# Altium PCB PCB_wordclocksmall_2023-02-03.pcbdoc (part 1 of 4)
Units mm, origin at the board's own origin, x right, y up, seen from the top; angles counter-clockwise.
Board outline 275.21 x 268.14 mm, 2 copper layers (Top Layer, Bottom Layer); 355 components, 229 nets, 1166 pads, 399 vias.
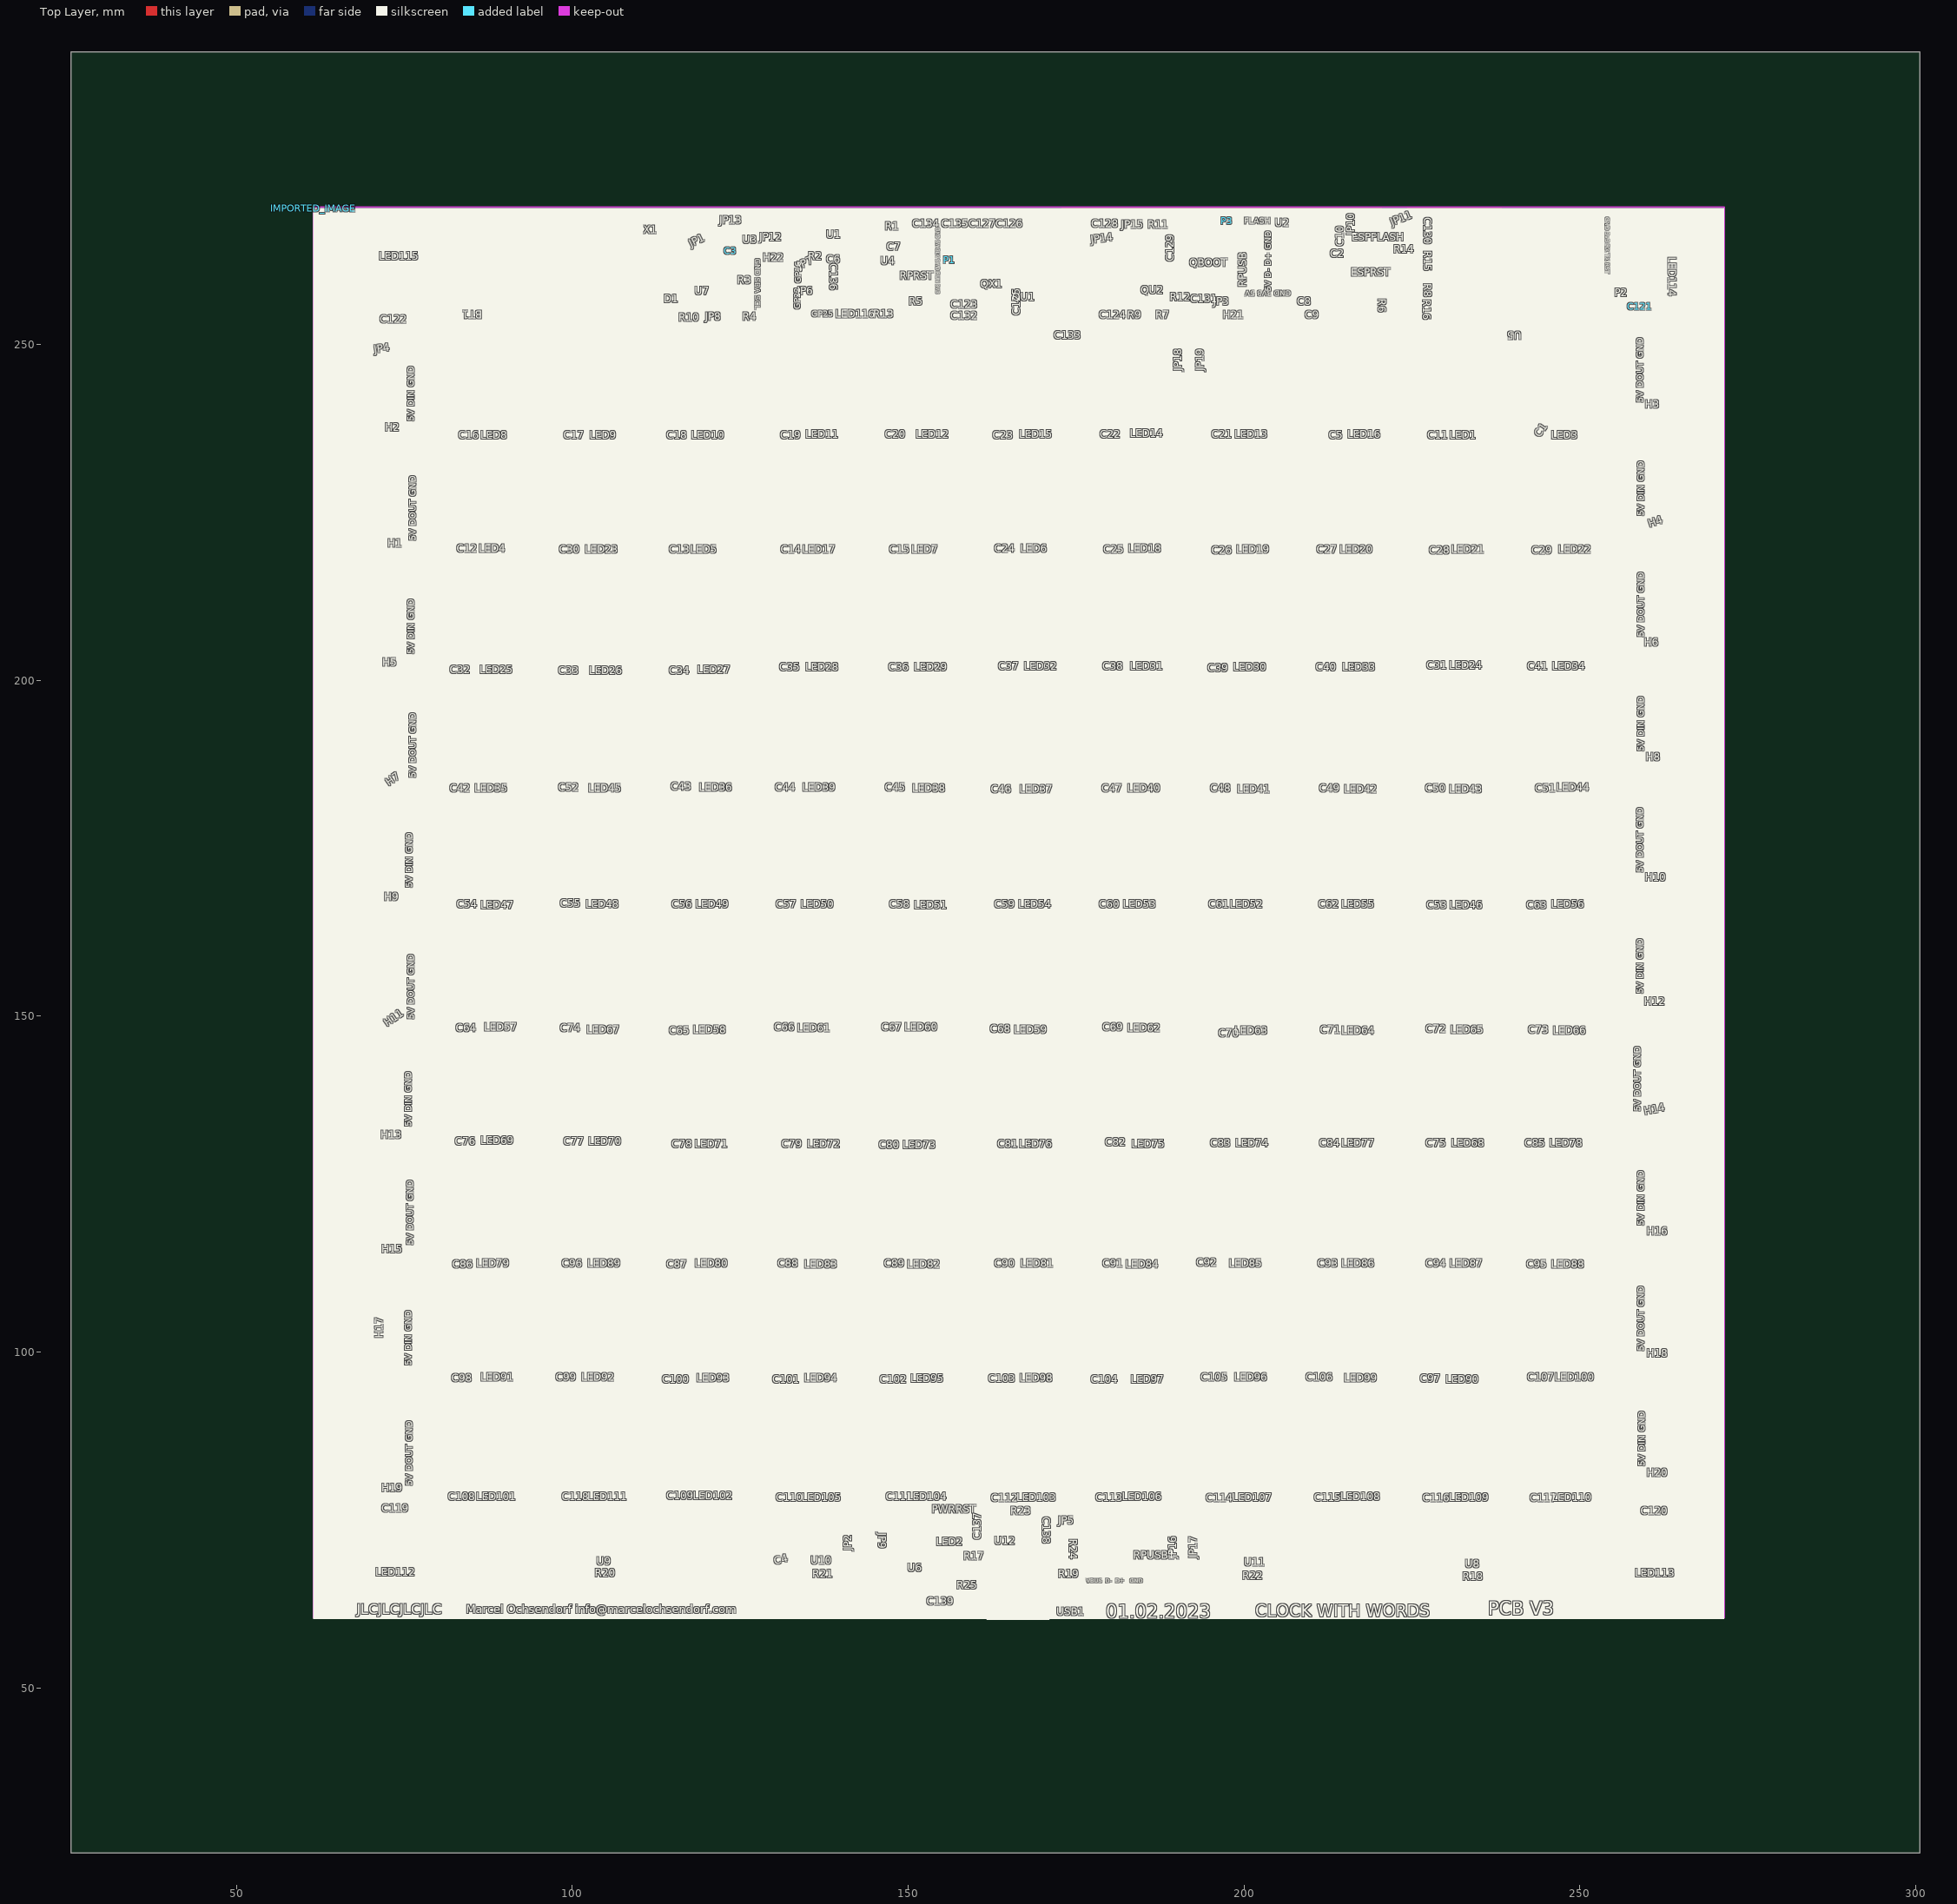
[diagram p0: Top Layer view]
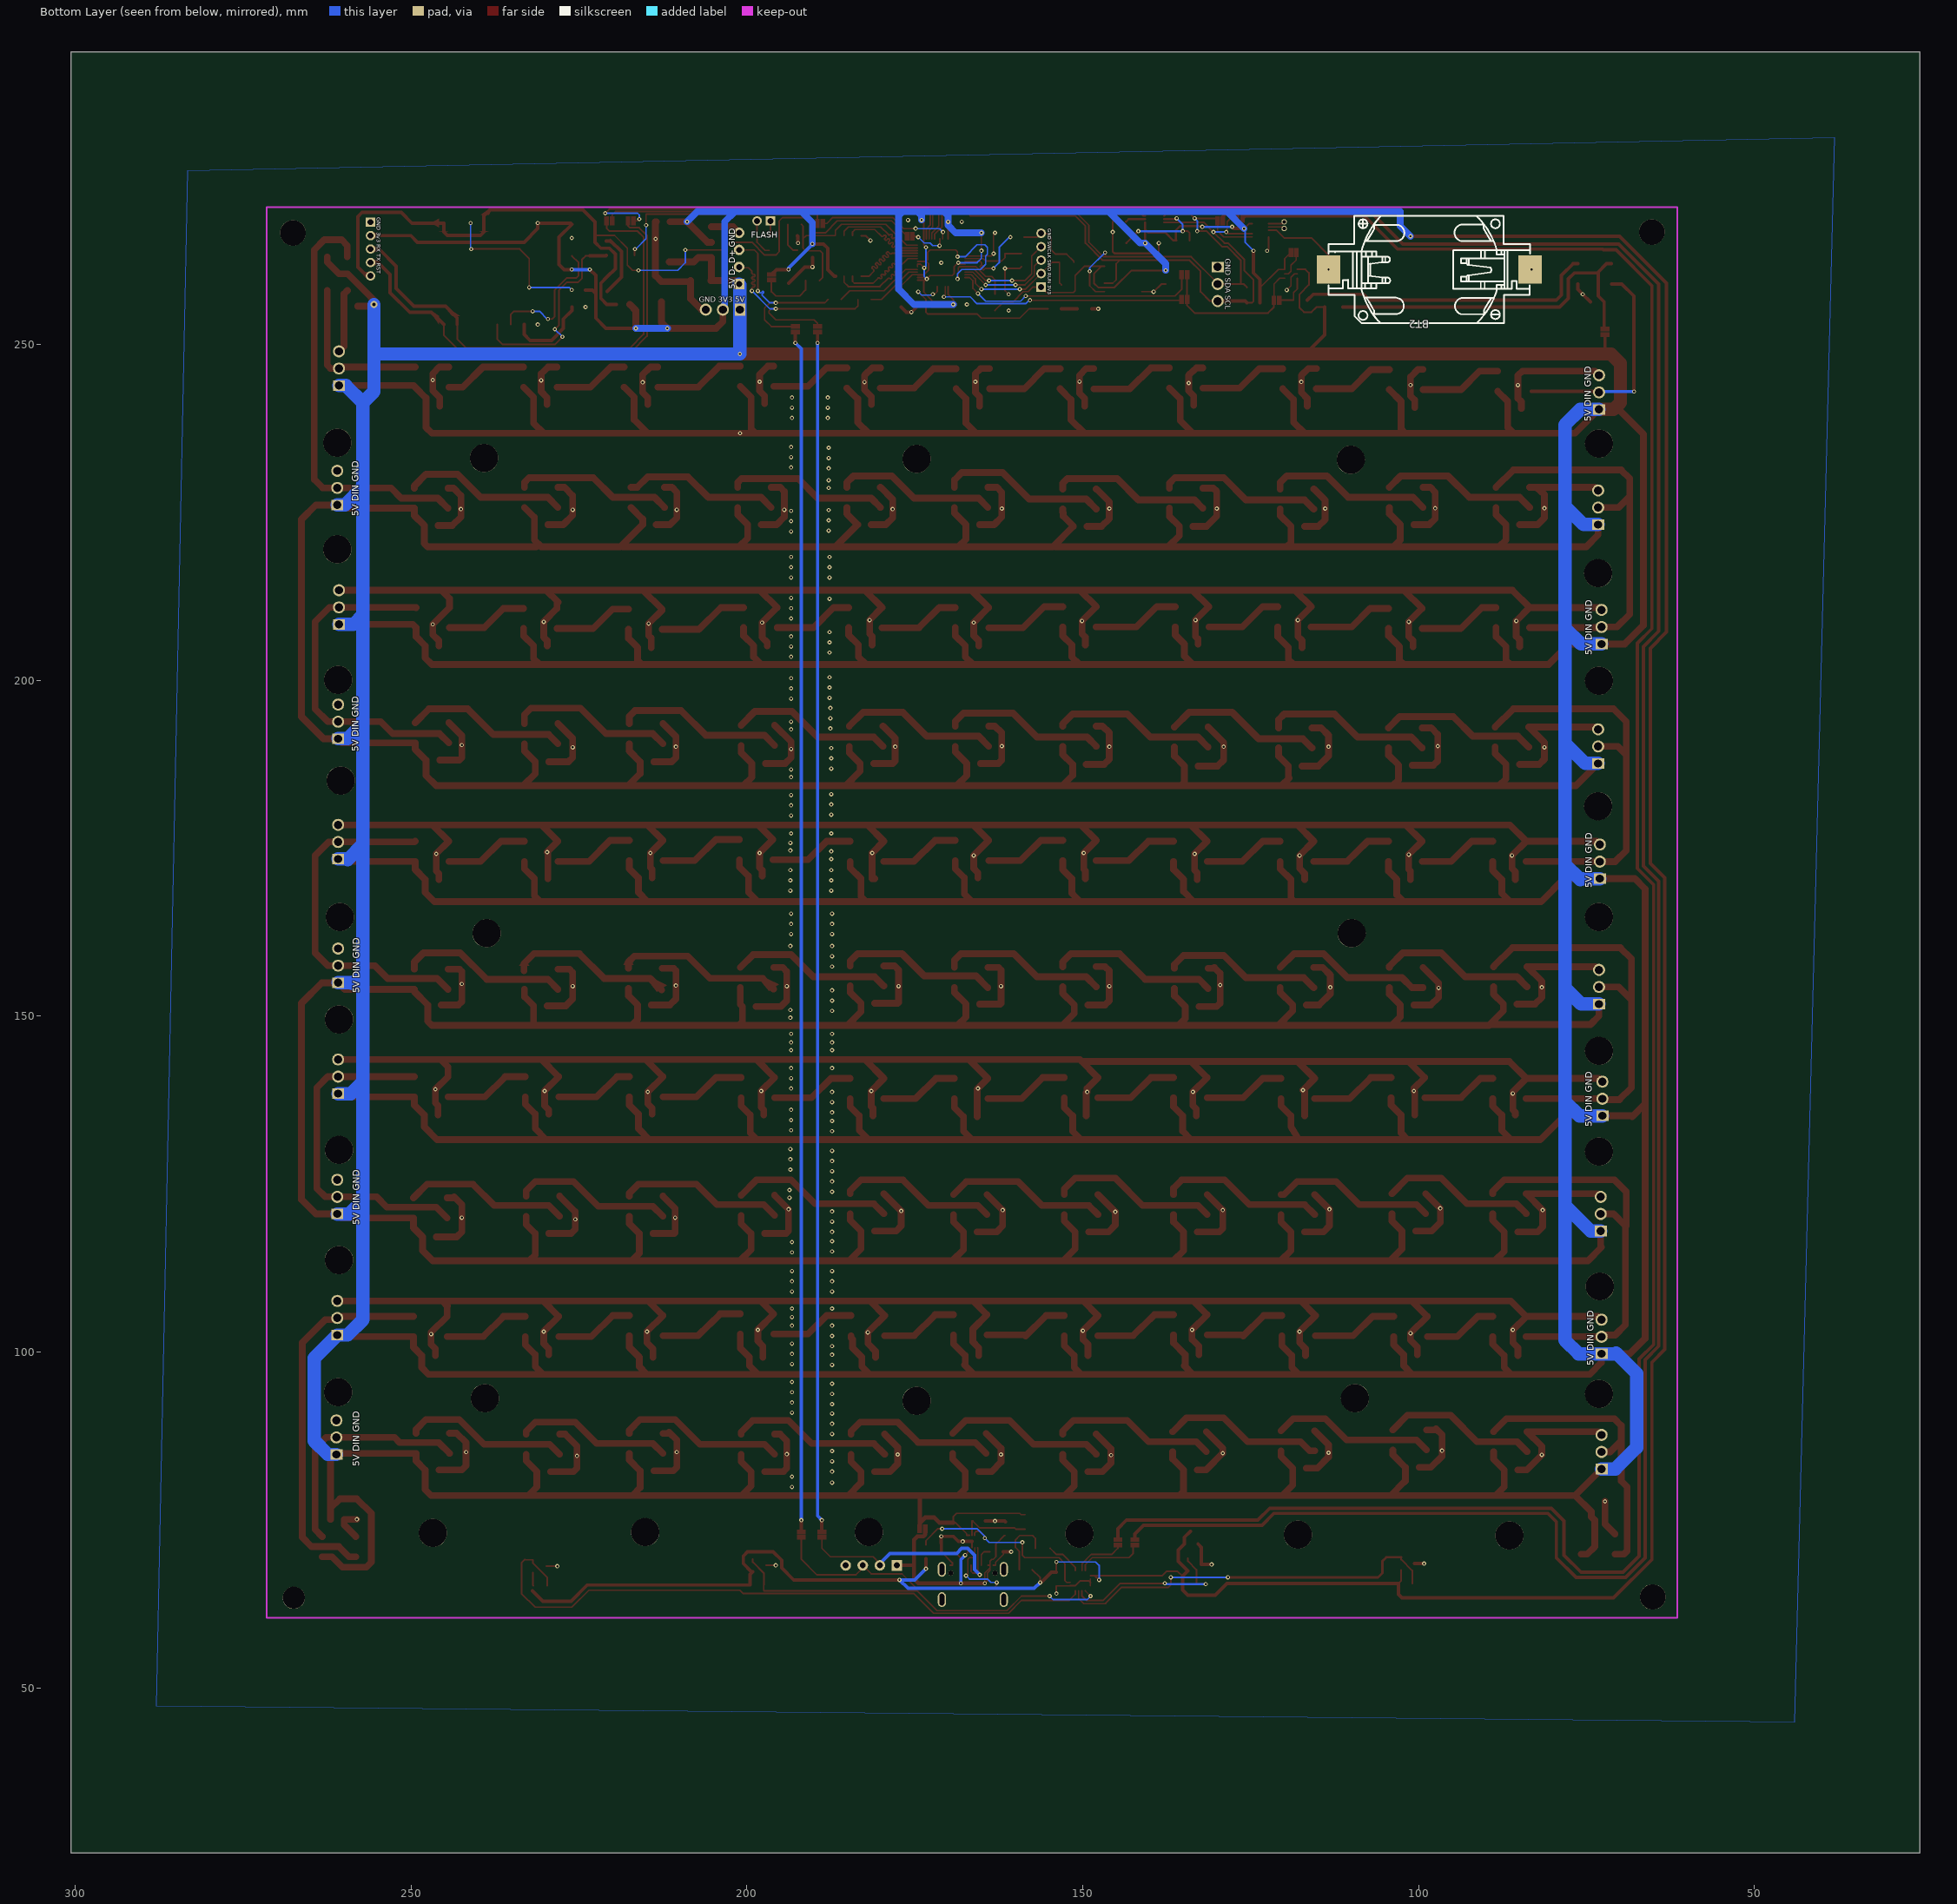
[diagram p1: Bottom Layer view, seen from below]

## Layer stack, top to bottom
Top Layer: signal copper (thickness not stored)
Dielectric: dielectric 0.32, FR-4, Dk 4.8
Bottom Layer: signal copper (thickness not stored)

## Board outline
300.609,25.4 25.4,25.4 25.4,293.542 300.609,293.542

## Components (designator, comment, footprint, x,y, rotation, side; value= is the part's Value field where it differs from the comment)
BT1 "BS-6-1" BAT-SMD_BS-6-1#1 98.425,261.157 r0 top
BT2 "BS-6-1" BAT-SMD_BS-6-1#2 98.425,261.157 r180 bottom
C1 "100nF" 0805 246.761,240.837 r180 top
C2 "100nF" 0805 212.598,262.3 r180 top
C3 "100nF" 0805 123.571,263.951 r180 top
C4 "100nF" 0805 133.858,71.419 r180 top
C5 "100nF" 0805 215.773,241.091 r180 top
C6 "100nF" 0805 139.7,265.094 r0 top
C7 "100nF" 0805 144.526,265.094 r0 top
C8 "100uF" CAP-SMD_L3.5-W2.8 206.883,259.506 r0 top
C9 "100uF" CAP-SMD_L3.5-W2.8 212.725,257.855 r90 top
C10 "100nF" 0805 212.471,268.269 r180 top
C11 "100nF" 0805 230.759,241.091 r180 top
C12 "100nF" 0805 85.979,223.184 r180 top
C13 "100nF" 0805 117.983,222.93 r180 top
C14 "100nF" 0805 134.62,222.93 r180 top
C15 "100nF" 0805 150.368,222.93 r180 top
C16 "100nF" 0805 85.725,240.456 r180 top
C17 "100nF" 0805 101.6,240.583 r180 top
C18 "100nF" 0805 117.602,240.837 r180 top
C19 "100nF" 0805 134.493,240.964 r180 top
C20 "100nF" 0805 150.749,240.837 r180 top
C21 "100nF" 0805 198.374,241.218 r180 top
C22 "100nF" 0805 182.499,241.091 r180 top
C23 "100nF" 0805 166.37,240.837 r180 top
C24 "100nF" 0805 166.37,223.184 r180 top
C25 "100nF" 0805 182.499,223.184 r180 top
C26 "100nF" 0805 198.882,223.184 r180 top
C27 "100nF" 0805 214.503,223.184 r180 top
C28 "100nF" 0805 230.632,223.184 r180 top
C29 "100nF" 0805 247.015,223.057 r180 top
C30 "100nF" 0805 101.727,223.184 r180 top
C31 "100nF" 0805 230.759,205.15 r180 top
C32 "100nF" 0805 85.979,205.023 r180 top
C33 "100nF" 0805 101.854,205.023 r180 top
C34 "100nF" 0805 118.364,204.896 r180 top
C35 "100nF" 0805 133.858,205.404 r180 top
C36 "100nF" 0805 150.622,205.277 r180 top
C37 "100nF" 0805 166.497,205.15 r180 top
C38 "100nF" 0805 182.372,205.277 r180 top
C39 "100nF" 0805 197.993,205.15 r180 top
C40 "100nF" 0805 215.265,204.896 r180 top
C41 "100nF" 0805 246.888,205.15 r180 top
C42 "100nF" 0805 85.979,187.497 r180 top
C43 "100nF" 0805 118.364,187.243 r180 top
C44 "100nF" 0805 133.858,187.243 r180 top
C45 "100nF" 0805 150.495,187.497 r180 top
C46 "100nF" 0805 166.243,187.624 r180 top
C47 "100nF" 0805 182.118,187.624 r180 top
C48 "100nF" 0805 198.247,187.624 r180 top
C49 "100nF" 0805 214.884,187.878 r180 top
C50 "100nF" 0805 230.505,187.878 r180 top
C51 "100nF" 0805 246.761,188.132 r180 top
C52 "100nF" 0805 101.981,187.37 r180 top
C53 "100nF" 0805 230.632,170.479 r180 top
C54 "100nF" 0805 86.614,170.352 r180 top
C55 "100nF" 0805 102.235,170.352 r180 top
C56 "100nF" 0805 117.983,170.352 r180 top
C57 "100nF" 0805 133.985,170.352 r180 top
C58 "100nF" 0805 150.622,170.479 r180 top
C59 "100nF" 0805 166.624,170.606 r180 top
C60 "100nF" 0805 181.991,170.479 r180 top
C61 "100nF" 0805 198.755,170.86 r180 top
C62 "100nF" 0805 215.138,170.606 r180 top
C63 "100nF" 0805 246.888,170.352 r180 top
C64 "100nF" 0805 86.36,151.81 r180 top
C65 "100nF" 0805 117.729,151.683 r180 top
C66 "100nF" 0805 133.731,151.429 r180 top
C67 "100nF" 0805 150.241,151.683 r180 top
C68 "100nF" 0805 166.37,151.81 r180 top
C69 "100nF" 0805 181.991,151.937 r180 top
C70 "100nF" 0805 199.644,151.429 r180 top
C71 "100nF" 0805 215.265,151.683 r180 top
C72 "100nF" 0805 230.759,151.556 r180 top
C73 "100nF" 0805 246.507,151.683 r180 top
C74 "100nF" 0805 101.727,151.683 r180 top
C75 "100nF" 0805 230.505,135.427 r180 top
C76 "100nF" 0805 86.614,135.3 r180 top
C77 "100nF" 0805 101.6,135.3 r180 top
C78 "100nF" 0805 117.983,135.173 r180 top
C79 "100nF" 0805 134.112,135.173 r180 top
C80 "100nF" 0805 150.495,135.173 r180 top
C81 "100nF" 0805 166.751,135.046 r180 top
C82 "100nF" 0805 182.245,135.173 r180 top
C83 "100nF" 0805 198.501,135.3 r180 top
C84 "100nF" 0805 215.138,135.427 r180 top
C85 "100nF" 0805 247.015,135.3 r180 top
C86 "100nF" 0805 86.233,117.901 r180 top
C87 "100nF" 0805 117.983,117.901 r180 top
C88 "100nF" 0805 133.985,117.901 r180 top
C89 "100nF" 0805 150.114,117.901 r180 top
C90 "100nF" 0805 166.751,117.901 r180 top
C91 "100nF" 0805 181.991,118.028 r180 top
C92 "100nF" 0805 198.374,117.647 r180 top
C93 "100nF" 0805 215.011,117.647 r180 top
C94 "100nF" 0805 230.505,117.647 r180 top
C95 "100nF" 0805 247.269,117.139 r180 top
C96 "100nF" 0805 101.473,118.028 r180 top
C97 "100nF" 0805 230.505,99.613 r180 top
C98 "100nF" 0805 86.233,99.486 r180 top
C99 "100nF" 0805 101.219,99.613 r180 top
C100 "100nF" 0805 117.856,99.486 r180 top
C101 "100nF" 0805 133.731,99.613 r180 top
C102 "100nF" 0805 150.241,99.486 r180 top
C103 "100nF" 0805 166.497,99.486 r180 top
C104 "100nF" 0805 181.864,99.232 r180 top
C105 "100nF" 0805 198.628,99.232 r180 top
C106 "100nF" 0805 215.011,99.232 r180 top
C107 "100nF" 0805 247.396,99.486 r180 top
C108 "100nF" 0805 86.233,82.468 r180 top
C109 "100nF" 0805 117.729,82.722 r180 top
C110 "100nF" 0805 133.985,82.468 r180 top
C111 "100nF" 0805 150.241,82.214 r180 top
C112 "100nF" 0805 166.497,82.214 r180 top
C113 "100nF" 0805 181.991,82.214 r180 top
C114 "100nF" 0805 198.374,82.214 r180 top
C115 "100nF" 0805 214.884,82.341 r180 top
C116 "100nF" 0805 230.251,82.214 r180 top
C117 "100nF" 0805 246.888,82.468 r180 top
C118 "100nF" 0805 100.965,82.849 r180 top
C119 "100nF" 0805 73.279,75.483 r180 top
C120 "100nF" 0805 260.985,75.102 r180 top
C121 "100nF" 0805 258.953,255.696 r0 top
C122 "100nF" 0805 73.406,256.331 r0 top
C123 "100nF" 0805 162.052,257.474 r180 top
C124 "100nF" 0805 177.038,256.585 r270 top
C125 "100nF" 0805 168.275,255.95 r0 top
C126 "100nF" 0805 169.037,268.269 r0 top
C127 "100nF" 0805 164.084,266.618 r0 top
C128 "100nF" 0805 175.006,268.523 r180 top
C129 "100nF" 0805 190.246,263.951 r270 top
C130 "100nF" 0805 226.06,266.872 r270 top
C131 "100nF" 0805 193.802,260.141 r90 top
C132 "100nF" 0805 162.052,255.061 r0 top
C133 "100nF" 0805 173.482,255.95 r180 top
C134 "10pF" C0805 159.131,262.554 r270 top
C135 "10pF" C0805 159.766,265.983 r0 top
C136 "100nF" 0805 137.668,260.014 r270 top
C137 "100nF" 0805 161.544,73.705 r90 top
C138 "100nF" 0805 169.291,73.578 r270 top
C139 "100nF" 0805 153.924,66.212 r90 top
D1 "CD4148WP" D1206-RD 112.649,255.569 r0 top
ESPFLASH "PTS810SJM250SMTRLFS" KEY-SMD_4P-L4.2-W3.2-P2.20-LS4.6 218.821,264.332 r0 top
ESPRST "PTS810SJM250SMTRLFS" KEY-SMD_4P-L4.2-W3.2-P2.20-LS4.6 218.694,258.998 r180 top
H1 "Header-Male-2.54_1x3" HDR-TH_3P-P2.54-V-M-1 73.279,225.724 r90 top
H2 "Header-Male-2.54_1x3" HDR-TH_3P-P2.54-V-M-1 73.152,242.869 r90 top
H3 "Header-Male-2.54_1x3" HDR-TH_3P-P2.54-V-M-1 260.731,246.425 r90 top
H4 "Header-Male-2.54_1x3" HDR-TH_3P-P2.54-V-M-1 260.985,228.645 r90 top
H5 "Header-Male-2.54_1x3" HDR-TH_3P-P2.54-V-M-1 72.771,207.944 r90 top
H6 "Header-Male-2.54_1x3" HDR-TH_3P-P2.54-V-M-1 260.731,210.865 r90 top
H7 "Header-Male-2.54_1x3" HDR-TH_3P-P2.54-V-M-1 73.279,190.164 r90 top
H8 "Header-Male-2.54_1x3" HDR-TH_3P-P2.54-V-M-1 260.858,193.847 r90 top
H9 "Header-Male-2.54_1x3" HDR-TH_3P-P2.54-V-M-1 73.025,173.019 r90 top
H10 "Header-Male-2.54_1x3" HDR-TH_3P-P2.54-V-M-1 260.858,175.94 r90 top
H11 "Header-Male-2.54_1x3" HDR-TH_3P-P2.54-V-M-1 73.152,154.35 r90 top
H12 "Header-Male-2.54_1x3" HDR-TH_3P-P2.54-V-M-1 260.858,157.525 r90 top
H13 "Header-Male-2.54_1x3" HDR-TH_3P-P2.54-V-M-1 72.644,137.713 r90 top
H14 "Header-Male-2.54_1x3" HDR-TH_3P-P2.54-V-M-1 260.858,141.015 r90 top
H15 "Header-Male-2.54_1x3" HDR-TH_3P-P2.54-V-M-1 72.898,120.568 r90 top
H16 "Header-Male-2.54_1x3" HDR-TH_3P-P2.54-V-M-1 260.985,123.108 r90 top
H17 "Header-Male-2.54_1x3" HDR-TH_3P-P2.54-V-M-1 72.771,102.28 r90 top
H18 "Header-Male-2.54_1x3" HDR-TH_3P-P2.54-V-M-1 260.985,105.074 r90 top
H19 "Header-Male-2.54_1x3" HDR-TH_3P-P2.54-V-M-1 72.771,85.135 r90 top
H20 "Header-Male-2.54_1x3" HDR-TH_3P-P2.54-V-M-1 261.112,87.294 r90 top
H21 "PWR" HDR-TH_3P-P2.54-V-M-1 203.581,255.188 r0 top
H22 "RPI2C" HDR-TH_3P-P2.54-V-M-1 129.921,258.998 r270 top
IMPORTED_IMAGE "IMPORTED_IMAGE" IMPORTED_IMAGE 61.468,270.272 r0 top
JP1 "OEE" JUMPERS_SMT-JUMPER_2_NC_PASTE_NO-SILK 118.618,263.697 r180 top
JP2 "PCF_SDA_EN" JUMPERS_SMT-JUMPER_2_NC_PASTE_NO-SILK 142.24,71.673 r90 top
JP3 "JUMPER-SMT_2" JUMPERS_SMT-JUMPER_2_NC_PASTE_NO-SILK 196.342,260.014 r90 top
JP4 "5VLSL" JUMPERS_SMT-JUMPER_2_NC_PASTE_NO-SILK 72.263,251.886 r90 top
JP5 "USBPWR_OVR" JUMPERS_SMT-JUMPER_2_NC_PASTE_NO-SILK 173.863,73.705 r180 top
JP6 "GP22WS" JUMPERS_SMT-JUMPER_2_NC_PASTE_NO-SILK 134.874,256.712 r180 top
JP7 "GP16WS" JUMPERS_SMT-JUMPER_2_NC_PASTE_NO-SILK 134.874,260.395 r180 top
JP8 "JUMPER-SMT_2" JUMPERS_SMT-JUMPER_2_NC_PASTE_NO-SILK 121.158,256.585 r0 top
JP9 "PCF_SCL_EN" JUMPERS_SMT-JUMPER_2_NC_PASTE_NO-SILK 144.78,71.673 r90 top
JP10 "ESPTX" JUMPERS_SMT-JUMPER_2_NC_PASTE_NO-SILK 217.297,268.396 r180 top
JP11 "ESPRX" JUMPERS_SMT-JUMPER_2_NC_PASTE_NO-SILK 220.472,268.396 r180 top
JP12 "PCF_SDA_EN" JUMPERS_SMT-JUMPER_2_NC_PASTE_NO-SILK 129.54,268.396 r0 top
JP13 "PCF_SCL_EN" JUMPERS_SMT-JUMPER_2_NC_PASTE_NO-SILK 126.619,268.777 r0 top
JP14 "RP_ESP_RST" JUMPERS_SMT-JUMPER_2_NC_PASTE_NO-SILK 175.768,266.11 r180 top
JP15 "RP_ESP_BOOT" JUMPERS_SMT-JUMPER_2_NC_PASTE_NO-SILK 189.103,268.015 r180 top
JP16 "USBC_TO_RP-" JUMPERS_SMT-JUMPER_2_NC_PASTE_NO-SILK 188.849,72.816 r90 top
JP17 "USBC_TO_RP+" JUMPERS_SMT-JUMPER_2_NC_PASTE_NO-SILK 191.897,72.816 r90 top
JP18 "USBC_TO_RP-" JUMPERS_SMT-JUMPER_2_NC_PASTE_NO-SILK 189.484,252.267 r90 top
JP19 "USBC_TO_RP+" JUMPERS_SMT-JUMPER_2_NC_PASTE_NO-SILK 192.786,252.267 r90 top
LED1 "WS2812B-B" LED-5050_4P 230.759,245.155 r0 top
LED2 "FC-2012HRK-620D" LED0805-RD_RED 155.956,70.784 r0 top
LED3 "WS2812B-B" LED-5050_4P 246.888,245.155 r0 top
LED4 "WS2812B-B" LED-5050_4P 85.979,227.248 r0 top
LED5 "WS2812B-B" LED-5050_4P 118.11,226.994 r0 top
LED6 "WS2812B-B" LED-5050_4P 166.624,227.248 r0 top
LED7 "WS2812B-B" LED-5050_4P 150.495,226.994 r0 top
LED8 "WS2812B-B" LED-5050_4P 85.725,244.52 r0 top
LED9 "WS2812B-B" LED-5050_4P 101.854,244.774 r0 top
LED10 "WS2812B-B" LED-5050_4P 117.729,244.901 r0 top
LED11 "WS2812B-B" LED-5050_4P 134.62,245.028 r0 top
LED12 "WS2812B-B" LED-5050_4P 150.876,244.901 r0 top
LED13 "WS2812B-B" LED-5050_4P 198.501,245.282 r0 top
LED14 "WS2812B-B" LED-5050_4P 182.626,245.028 r0 top
LED15 "WS2812B-B" LED-5050_4P 166.37,244.901 r0 top
LED16 "WS2812B-B" LED-5050_4P 215.773,245.155 r0 top
LED17 "WS2812B-B" LED-5050_4P 134.62,227.121 r0 top
LED18 "WS2812B-B" LED-5050_4P 182.626,227.248 r0 top
LED19 "WS2812B-B" LED-5050_4P 198.882,227.248 r0 top
LED20 "WS2812B-B" LED-5050_4P 214.757,227.248 r0 top
LED21 "WS2812B-B" LED-5050_4P 230.632,227.248 r0 top
LED22 "WS2812B-B" LED-5050_4P 247.015,227.121 r0 top
LED23 "WS2812B-B" LED-5050_4P 101.854,227.248 r0 top
LED24 "WS2812B-B" LED-5050_4P 230.759,209.214 r0 top
LED25 "WS2812B-B" LED-5050_4P 85.979,209.341 r0 top
LED26 "WS2812B-B" LED-5050_4P 101.981,209.214 r0 top
LED27 "WS2812B-B" LED-5050_4P 118.491,209.468 r0 top
LED28 "WS2812B-B" LED-5050_4P 133.731,209.468 r0 top
LED29 "WS2812B-B" LED-5050_4P 150.495,209.468 r0 top
LED30 "WS2812B-B" LED-5050_4P 197.993,209.341 r0 top
LED31 "WS2812B-B" LED-5050_4P 182.372,209.341 r0 top
LED32 "WS2812B-B" LED-5050_4P 166.497,209.341 r0 top
LED33 "WS2812B-B" LED-5050_4P 215.138,209.087 r0 top
LED34 "WS2812B-B" LED-5050_4P 246.761,209.341 r0 top
LED35 "WS2812B-B" LED-5050_4P 86.106,191.561 r0 top
LED36 "WS2812B-B" LED-5050_4P 118.364,191.434 r0 top
LED37 "WS2812B-B" LED-5050_4P 166.497,191.688 r0 top
LED38 "WS2812B-B" LED-5050_4P 150.495,191.688 r0 top
LED39 "WS2812B-B" LED-5050_4P 133.858,191.561 r0 top
LED40 "WS2812B-B" LED-5050_4P 182.245,191.688 r0 top
LED41 "WS2812B-B" LED-5050_4P 198.374,191.815 r0 top
LED42 "WS2812B-B" LED-5050_4P 215.011,192.069 r0 top
LED43 "WS2812B-B" LED-5050_4P 230.632,192.069 r0 top
LED44 "WS2812B-B" LED-5050_4P 246.888,192.196 r0 top
LED45 "WS2812B-B" LED-5050_4P 101.981,191.434 r0 top
LED46 "WS2812B-B" LED-5050_4P 230.632,174.543 r0 top
LED47 "WS2812B-B" LED-5050_4P 86.487,174.543 r0 top
LED48 "WS2812B-B" LED-5050_4P 101.981,174.543 r0 top
LED49 "WS2812B-B" LED-5050_4P 118.11,174.543 r0 top
LED50 "WS2812B-B" LED-5050_4P 133.985,174.543 r0 top
LED51 "WS2812B-B" LED-5050_4P 150.495,174.67 r0 top
LED52 "WS2812B-B" LED-5050_4P 198.628,174.797 r0 top
LED53 "WS2812B-B" LED-5050_4P 182.118,174.543 r0 top
LED54 "WS2812B-B" LED-5050_4P 166.497,174.67 r0 top
LED55 "WS2812B-B" LED-5050_4P 215.011,174.67 r0 top
LED56 "WS2812B-B" LED-5050_4P 246.888,174.543 r0 top
LED57 "WS2812B-B" LED-5050_4P 86.36,155.874 r0 top
LED58 "WS2812B-B" LED-5050_4P 118.11,155.747 r0 top
LED59 "WS2812B-B" LED-5050_4P 166.624,155.747 r0 top
LED60 "WS2812B-B" LED-5050_4P 150.495,155.874 r0 top
LED61 "WS2812B-B" LED-5050_4P 133.858,155.62 r0 top
LED62 "WS2812B-B" LED-5050_4P 182.118,156.001 r0 top
LED63 "WS2812B-B" LED-5050_4P 198.501,155.747 r0 top
LED64 "WS2812B-B" LED-5050_4P 215.138,155.62 r0 top
LED65 "WS2812B-B" LED-5050_4P 230.632,155.493 r0 top
LED66 "WS2812B-B" LED-5050_4P 247.015,155.493 r0 top
LED67 "WS2812B-B" LED-5050_4P 101.854,155.747 r0 top
LED68 "WS2812B-B" LED-5050_4P 230.505,139.491 r0 top
LED69 "WS2812B-B" LED-5050_4P 86.487,139.237 r0 top
LED70 "WS2812B-B" LED-5050_4P 101.6,139.364 r0 top
LED71 "WS2812B-B" LED-5050_4P 117.983,139.237 r0 top
LED72 "WS2812B-B" LED-5050_4P 133.985,139.364 r0 top
LED73 "WS2812B-B" LED-5050_4P 150.241,139.364 r0 top
LED74 "WS2812B-B" LED-5050_4P 198.374,139.364 r0 top
LED75 "WS2812B-B" LED-5050_4P 182.118,139.237 r0 top
LED76 "WS2812B-B" LED-5050_4P 166.624,139.237 r0 top
LED77 "WS2812B-B" LED-5050_4P 215.011,139.491 r0 top
LED78 "WS2812B-B" LED-5050_4P 247.015,139.491 r0 top
LED79 "WS2812B-B" LED-5050_4P 86.487,122.092 r0 top
LED80 "WS2812B-B" LED-5050_4P 117.983,121.965 r0 top
LED81 "WS2812B-B" LED-5050_4P 166.751,121.965 r0 top
LED82 "WS2812B-B" LED-5050_4P 150.241,121.965 r0 top
LED83 "WS2812B-B" LED-5050_4P 133.985,121.965 r0 top
LED84 "WS2812B-B" LED-5050_4P 182.118,122.092 r0 top
LED85 "WS2812B-B" LED-5050_4P 198.374,121.838 r0 top
LED86 "WS2812B-B" LED-5050_4P 215.011,121.711 r0 top
LED87 "WS2812B-B" LED-5050_4P 230.378,121.711 r0 top
LED88 "WS2812B-B" LED-5050_4P 247.142,121.457 r0 top
LED89 "WS2812B-B" LED-5050_4P 101.473,122.092 r0 top
LED90 "WS2812B-B" LED-5050_4P 230.505,103.804 r0 top
LED91 "WS2812B-B" LED-5050_4P 86.487,103.804 r0 top
LED92 "WS2812B-B" LED-5050_4P 101.219,103.804 r0 top
LED93 "WS2812B-B" LED-5050_4P 117.856,103.931 r0 top
LED94 "WS2812B-B" LED-5050_4P 133.985,104.058 r0 top
LED95 "WS2812B-B" LED-5050_4P 150.241,103.931 r0 top
LED96 "WS2812B-B" LED-5050_4P 198.501,104.185 r0 top
LED97 "WS2812B-B" LED-5050_4P 181.991,103.931 r0 top
LED98 "WS2812B-B" LED-5050_4P 166.751,104.058 r0 top
LED99 "WS2812B-B" LED-5050_4P 215.011,103.931 r0 top
LED100 "WS2812B-B" LED-5050_4P 247.142,103.804 r0 top
LED101 "WS2812B-B" LED-5050_4P 86.36,86.659 r0 top
LED102 "WS2812B-B" LED-5050_4P 117.983,86.786 r0 top
LED103 "WS2812B-B" LED-5050_4P 166.878,86.405 r0 top
LED104 "WS2812B-B" LED-5050_4P 150.495,86.278 r0 top
LED105 "WS2812B-B" LED-5050_4P 134.112,86.659 r0 top
LED106 "WS2812B-B" LED-5050_4P 181.991,86.278 r0 top
LED107 "WS2812B-B" LED-5050_4P 198.374,86.278 r0 top
LED108 "WS2812B-B" LED-5050_4P 215.011,86.405 r0 top
LED109 "WS2812B-B" LED-5050_4P 230.378,86.278 r0 top
LED110 "WS2812B-B" LED-5050_4P 246.761,86.405 r0 top
LED111 "WS2812B-B" LED-5050_4P 101.346,86.913 r0 top
LED112 "WS2812B-B" LED-5050_4P 73.279,71.419 r0 top
LED113 "WS2812B-B" LED-5050_4P 260.731,71.038 r0 top
LED114 "WS2812B-B" LED-5050_4P 260.985,260.522 r90 top
LED115 "WS2812B-B" LED-5050_4P 73.787,260.522 r180 top
LED116 "FC-2012HRK-620D" LED0805-RD_RED 149.733,255.315 r0 top
P1 "RPSWD" HDR-TH_5P-P2.00-V-F-1 156.21,262.554 r90 top
P2 "ESPPROG" HDR-TH_5P-P2.00-V-F-1 256.032,264.205 r270 top
P3 "Female header1*2P" HDR-TH_2P-P2.00-V-F-1 197.485,268.396 r0 top
PWRRST "PTS810SJM250SMTRLFS" KEY-SMD_4P-L4.2-W3.2-P2.20-LS4.6 156.464,74.721 r0 top
QBOOT "PTS810SJM250SMTRLFS" KEY-SMD_4P-L4.2-W3.2-P2.20-LS4.6 194.564,265.094 r180 top
QU1 "RP2040" LQFN-56_L7.0-W7.0-P0.4-EP 171.069,262.173 r270 top
QU2 "W25Q128JWPIQ" WSON-8_L6.0-W5.0-P1.27-BL-EP 184.912,263.189 r180 top
QX1 "12MHz" CRYSTAL-SMD_4P-L3.2-W2.5-BL 162.433,262.427 r270 top
R1 "4.7K" R0805#1 144.526,268.269 r0 top
R2 "1kΩ" R0805#2 135.128,265.475 r0 top
R3 "4.7K" R0805#1 124.587,258.49 r0 top
R4 "4.7K" R0805#1 124.587,256.204 r0 top
R5 "10K" 0805 152.146,258.871 r180 top
R6 "10K" 0805 218.44,255.95 r180 top
R7 "27Ω" R0805#1 186.944,256.712 r0 top
R8 "10K" 0805 225.044,258.109 r180 top
R9 "27Ω" R0805#1 182.499,256.712 r0 top
R10 "50" 0805 117.602,256.585 r0 top
R11 "1K" 0805 192.913,267.888 r0 top
R12 "1K" 0805 190.246,259.506 r180 top
R13 "100Ω" R0805#1 154.178,255.315 r180 top
R14 "10K" 0805 223.393,262.173 r90 top
R15 "10K" 0805 226.06,262.173 r90 top
R16 "10K" 0805 225.044,255.569 r0 top
R17 "5.1kΩ" R0805#2 162.814,70.276 r0 top
R18 "10K" 0805 230.759,65.196 r0 top
R19 "5.1kΩ" R0805#2 170.053,70.276 r180 top
R20 "10K" 0805 101.981,65.577 r0 top
R21 "10K" 0805 134.112,65.45 r0 top
R22 "10K" 0805 198.501,65.323 r0 top
R23 "10K" 0805 165.481,74.848 r0 top
R24 "10K" 0805 173.355,70.276 r270 top
R25 "100Ω" R0805#1 158.496,67.609 r0 top
RPRST "PTS810SJM250SMTRLFS" KEY-SMD_4P-L4.2-W3.2-P2.20-LS4.6 152.4,264.332 r270 top
RPUSB "HDR-M-2.54_1x4" HDR-M-2.54_1X4 201.168,262.808 r90 top
RPUSB1 "HDR-M-2.54_1x4" HDR-M-2.54_1X4 181.483,68.244 r0 top
U1 "BH1750FVI-TR" WSOF-6_L2.6-W1.6-P0.50-TL-EP 139.319,268.65 r180 top
U2 "AMS1117-3.3" SOT-223_L6.5-W3.5-P2.30-LS7.0-BR 208.407,265.221 r180 top
U3 "PCF85263ATL/AX" DFN-10_L2.6-W2.6-P0.50-BL-EP 123.571,266.999 r270 top
U4 "M24C02-WMN6TP" SOIC-8_L4.9-W3.9-P1.27-LS6.0-BL 144.018,259.76 r270 top
U5 "ESP-12F(ESP8266MOD)" WIFIM-SMD_ESP-12F-ESP8266MOD 237.49,260.522 r180 top
U6 "PCF8574RGTR" WQFN-16_L3.0-W3.0-P0.50-TL-EP1.6 150.368,65.958 r0 top
U7 "TXB0101DCKR" SC-70-6_L2.2-W1.3-P0.65-LS2.2-BR 118.999,260.522 r180 top
U8 "MT8315ET" SOT-23-3_L2.9-W1.3-P1.90-LS2.4-BR 230.886,68.117 r0 top
U9 "MT8315ET" SOT-23-3_L2.9-W1.3-P1.90-LS2.4-BR 101.6,68.498 r0 top
U10 "MT8315ET" SOT-23-3_L2.9-W1.3-P1.90-LS2.4-BR 133.35,68.371 r0 top
U11 "MT8315ET" SOT-23-3_L2.9-W1.3-P1.90-LS2.4-BR 198.12,68.244 r0 top
U12 "TPD4S014DSQR" WSON-10_L2.0-W2.0-P0.40-BL-EP 166.497,71.8 r180 top
USB1 "TYPE-C-31-M-26A" USB-C-SMD_TYPE-C-31-M-26A 166.37,65.704 r0 top
X1 "CFV206-60.003KDZF" OSC-TH_BD2.0-P0.70-D0.3 120.015,267.761 r0 top
? "" ? 54.253,164.891 r0 top
? "" ? 166.56,42.974 r0 top
? "" ? 113.924,56.694 r0 top

## Footprints (in the part's own frame and the unit in brackets; to place one, negate y for a bottom-side part, rotate by r counter-clockwise, add the part's x,y. Pads: shape width x height; smd on the part's side, far side on the other; paste and mask are expansions set on the pad)
0805 [mm]
  rect 1.16x1.45 smd: 1(-1.016,0) 2(1.016,0)
  silkscreen extent -1.9,-1.03 1.87,1.04
BAT-SMD_BS-6-1#1 [mm]
  rect 3.5x4.2 smd: 1(14.988,0) 2(-14.988,0)
  silkscreen extent -14.99,-8 15.01,8
BAT-SMD_BS-6-1#2 [mm]
  rect 3.5x4.2 smd: 1(-14.988,0) 2(14.988,0)
  silkscreen extent -15.01,-8 14.99,8
C0805 [mm]
  rect 1.41x1.35 smd: 1(-1,0) 2(1,0)
  silkscreen extent -1.96,-0.9 1.96,0.9
CAP-SMD_L3.5-W2.8 [mm]
  rect 1.8x2.6 smd: 1(-1.501,0) 2(1.501,0)
  silkscreen extent -3.26,-1.65 2.73,1.65
CRYSTAL-SMD_4P-L3.2-W2.5-BL [mm]
  rect 1.4x1.2 smd: 1(-1.1,-0.85) 2(1.1,-0.85) 3(1.1,0.85) 4(-1.1,0.85)
  silkscreen extent -2.26,-1.91 2.03,1.68
D1206-RD [mm]
  rect 1.785x1.62 smd: 1(-1.343,0) 2(1.342,0)
  silkscreen extent -2.77,-1.08 2.46,1.08
DFN-10_L2.6-W2.6-P0.50-BL-EP [mm]
  rect 0.28x0.585 smd: 1(-1,-1.217) 2(-0.5,-1.217) 3(0,-1.217) 4(0.5,-1.217) 5(1,-1.217) 6(1,1.217) 7(0.5,1.217) 8(0,1.217) 9(-0.5,1.217) 10(-1,1.217)
  rect 2.3x1.3 smd: 11(0,0)
  silkscreen extent -1.38,-1.88 1.38,1.38
HDR-M-2.54_1X4 [mil]
  rect 62x62 hole 35: 1(-150,0)
  round 62 hole 35: 2(-50,0) 3(50,0) 4(150,0)
  silkscreen extent -200,-50 200,50
HDR-TH_2P-P2.00-V-F-1 [mm]
  rect 1.4x1.4 hole 0.889: 1(-1,0)
  round 1.4 hole 0.889: 2(1,0)
  silkscreen extent -2.14,-1.32 2.12,1.35
HDR-TH_3P-P2.54-V-M-1 [mm]
  rect 1.575x1.8 hole 1.2: 1(-2.54,0)
  round 1.8 hole 1.2: 2(0,0) 3(2.54,0)
  silkscreen extent -3.81,-1.27 3.81,1.27
HDR-TH_5P-P2.00-V-F-1 [mm]
  rect 1.4x1.4 hole 0.889: 1(-4,0)
  round 1.4 hole 0.889: 2(-2,0) 3(0,0) 4(2,0) 5(4,0)
  silkscreen extent -5,-1 5,1.03
IMPORTED_IMAGE [mm]
  silkscreen extent 0,-210 210,0
JUMPERS_SMT-JUMPER_2_NC_PASTE_NO-SILK [mil]
  round 0 smd: 1(-16,0) 2(16,0)
  Top Layer region: -28.5,25 -3.5,25 -3.5,-25 -28.5,-25
  Top Layer region: 3.5,25 28.5,25 28.5,-25 3.5,-25
  silkscreen extent -46,-40 46,40
KEY-SMD_4P-L4.2-W3.2-P2.20-LS4.6 [mm]
  rect 1.05x0.7 smd: 1(-2.1,1.075) 2(2.1,1.075) 3(-2.1,-1.075) 4(2.1,-1.075)
  silkscreen extent -2.2,-1.55 2.2,1.52
LED0805-RD_RED [mm]
  rect 1x1.25 smd: 1(-1.1,0) 2(1.1,0)
  silkscreen extent -2.1,-0.95 1.98,0.96
LED-5050_4P [mm]
  rect 1.5x1 smd: 1(2.5,-1.5) 2(2.5,1.5) 3(-2.5,1.5) 4(-2.5,-1.5)
  silkscreen extent -2.7,-2.5 2.5,2.65
LQFN-56_L7.0-W7.0-P0.4-EP [mm]
  rect 1.1x0.2 smd: 1(-3.55,2.6) 2(-3.55,2.2) 3(-3.55,1.8) 4(-3.55,1.4) 5(-3.55,1) 6(-3.55,0.6) 7(-3.55,0.2) 8(-3.55,-0.2) 9(-3.55,-0.6) 10(-3.55,-1) 11(-3.55,-1.4) 12(-3.55,-1.8) 13(-3.55,-2.2) 14(-3.55,-2.6) 29(3.55,-2.6) 30(3.55,-2.2) 31(3.55,-1.8) 32(3.55,-1.4) 33(3.55,-1) 34(3.55,-0.6) 35(3.55,-0.2) 36(3.55,0.2) 37(3.55,0.6) 38(3.55,1) 39(3.55,1.4) 40(3.55,1.8) 41(3.55,2.2) 42(3.55,2.6)
  rect 0.2x1.1 smd: 15(-2.6,-3.55) 16(-2.2,-3.55) 17(-1.8,-3.55) 18(-1.4,-3.55) 19(-1,-3.55) 20(-0.6,-3.55) 21(-0.2,-3.55) 22(0.2,-3.55) 23(0.6,-3.55) 24(1,-3.55) 25(1.4,-3.55) 26(1.8,-3.55) 27(2.2,-3.55) 28(2.6,-3.55) 43(2.6,3.55) 44(2.2,3.55) 45(1.8,3.55) 46(1.4,3.55) 47(1,3.55) 48(0.6,3.55) 49(0.2,3.55) 50(-0.2,3.55) 51(-0.6,3.55) 52(-1,3.55) 53(-1.4,3.55) 54(-1.8,3.55) 55(-2.2,3.55) 56(-2.6,3.55)
  rect 3.1x3.1 smd: 57(0,0)
  silkscreen extent -4.13,-3.5 3.5,3.83
OSC-TH_BD2.0-P0.70-D0.3 [mm]
  round 0.8 hole 0.5: 1(0,0.5) 2(0,-0.5)
  silkscreen extent -7.6,-1 -0.54,1
R0805#1 [mm]
  rect 1.133x1.377 smd: 1(-0.966,0) 2(0.966,0)
  silkscreen extent -1.76,-0.92 1.76,0.92
R0805#2 [mm]
  rect 1.133x1.377 smd: 1(-1,0) 2(1,0)
  silkscreen extent -1.76,-0.92 1.76,0.92
SC-70-6_L2.2-W1.3-P0.65-LS2.2-BR [mm]
  rect 0.841x0.315 smd: 1(0.945,-0.65) 2(0.945,0) 3(0.945,0.65) 4(-0.945,0.65) 5(-0.945,0) 6(-0.945,-0.65)
  silkscreen extent -0.7,-1.41 1.15,1.08
SOIC-8_L4.9-W3.9-P1.27-LS6.0-BL [mm]
  oval 0.588x2.045 smd: 1(-1.905,-2.773) 2(-0.635,-2.773) 3(0.635,-2.773) 4(1.905,-2.773) 5(1.905,2.773) 6(0.635,2.773) 7(-0.635,2.773) 8(-1.905,2.773)
  silkscreen extent -2.8,-2.92 2.53,1.52
SOT-23-3_L2.9-W1.3-P1.90-LS2.4-BR [mm]
  rect 1.25x0.7 smd: 1(1,-0.95) 2(1,0.95) 3(-1,0)
  silkscreen extent -0.73,-1.53 0.73,1.53
SOT-223_L6.5-W3.5-P2.30-LS7.0-BR [mil]
  rect 85x43 smd: 1(122,-90.5) 2(122,0.5) 3(122,90.5)
  rect 85x138 smd: 4(-122,0.5)
  silkscreen extent -64,-132 64,132
USB-C-SMD_TYPE-C-31-M-26A [mm]
  oval 1.2x2.2 hole 0.7 slot 1.7 at 90 deg: 17(4.61,1.947) 18(4.61,-2.552) 19(-4.61,-2.552) 20(-4.61,1.947)
  rect 0.3x1.21 smd: A1(-3.4,2.553) A4(-2.56,2.553) A5(-1.25,2.553) A6(-0.25,2.553) A7(0.25,2.553) A8(1.25,2.553) A9(2.55,2.553) A12(3.35,2.553) B1(3.05,2.553) B4(2.24,2.553) B5(1.75,2.553) B6(0.75,2.553) B7(-0.75,2.553) B8(-1.75,2.553) B9(-2.24,2.553) B12(-3.05,2.553)
  round 0.75 hole 0.75 unplated: ""(-3.3,1.387) ""(3.3,1.387)
  silkscreen extent -4.61,-5.45 4.61,2.6
WIFIM-SMD_ESP-12F-ESP8266MOD [mm]
  rect 1.4x2.5 smd: 1(-7.651,-7.551) 2(-5.651,-7.551) 3(-3.651,-7.551) 4(-1.651,-7.551) 5(0.349,-7.551) 6(2.349,-7.551) 7(4.349,-7.551) 8(6.349,-7.551) 9(6.349,7.549) 10(4.349,7.55) 11(2.349,7.551) 12(0.349,7.551) 13(-1.651,7.55) 14(-3.651,7.551) 15(-5.651,7.55) 16(-7.651,7.551)
  rect 1.7x1.4 smd: 17(7.65,-5) 18(7.649,-3.002) 19(7.649,-1.003) 20(7.649,0.998) 21(7.649,2.997) 22(7.65,4.997)
  silkscreen extent -16.15,-8.92 7.85,8
WQFN-16_L3.0-W3.0-P0.50-TL-EP1.6 [mm]
  rect 0.8x0.28 smd: 1(-1.5,0.749) 2(-1.5,0.249) 3(-1.5,-0.249) 4(-1.5,-0.749) 9(1.5,-0.749) 10(1.5,-0.249) 11(1.5,0.249) 12(1.5,0.749)
  rect 0.28x0.8 smd: 5(-0.749,-1.5) 6(-0.249,-1.5) 7(0.249,-1.5) 8(0.749,-1.5) 13(0.749,1.5) 14(0.249,1.5) 15(-0.249,1.5) 16(-0.749,1.5)
  rect 1.6x1.6 smd: 17(0,0)
  silkscreen extent -2.38,-1.72 1.72,1.72
WSOF-6_L2.6-W1.6-P0.50-TL-EP [mm]
  rect 0.505x0.28 smd: 1(-1.428,0.5) 2(-1.428,0) 3(-1.428,-0.5) 4(1.428,-0.5) 5(1.428,0) 6(1.428,0.5)
  rect 1.5x1.2 smd: 7(0,0)
  silkscreen extent -2.05,-0.88 1.58,0.88
WSON-8_L6.0-W5.0-P1.27-BL-EP [mm]
  oval 0.581x1.276 smd: 1(-1.905,-3.013) 2(-0.635,-3.013) 3(0.635,-3.013) 4(1.905,-3.013) 5(1.905,3.013) 6(0.635,3.013) 7(-0.635,3.013) 8(-1.905,3.013)
  rect 4.3x3.4 smd: 9(0,0)
  silkscreen extent -2.58,-4.05 2.58,3.08
WSON-10_L2.0-W2.0-P0.40-BL-EP [mm]
  rect 0.224x0.505 smd: 1(-0.8,-0.928) 2(-0.4,-0.928) 3(0,-0.928) 4(0.4,-0.928) 5(0.8,-0.928) 6(0.8,0.928) 7(0.4,0.928) 8(0,0.928) 9(-0.4,0.928) 10(-0.8,0.928)
  rect 1.5x0.9 smd: 11(0,0)
  silkscreen extent -1.08,-1.58 1.08,1.08
? [mm]

## Free pads (board coordinates)
  round 3.81 hole 3.81 unplated: ""(65.151,63.545) ""(65.278,266.745) ""(267.589,266.618)
  round 4.2 hole 4.2 unplated: ""(73.025,109.773) ""(73.152,93.771) ""(73.152,129.839) ""(73.152,144.825) ""(73.152,164.764) ""(73.152,199.943) ""(73.152,235.249) ""(73.279,181.274) ""(73.279,215.945) ""(86.487,72.689) ""(109.474,93.136) ""(109.982,162.351) ""(110.109,232.836) ""(117.983,72.816) ""(150.495,72.943) ""(174.752,92.755) ""(174.752,232.963) ""(181.864,73.197) ""(215.138,73.197) ""(238.76,162.351) ""(239.014,93.136) ""(239.141,233.09) ""(246.761,73.07) ""(260.477,185.084) ""(260.604,164.764) ""(260.731,113.71) ""(260.731,130.093) ""(260.731,149.524) ""(260.858,94.025) ""(260.858,200.07) ""(260.985,219.501) ""(260.985,235.376)
  round 3.3 hole 3.3 unplated: ""(267.462,63.418)

## Via types
v1: diameter 0.635, hole 0.305, Top Layer to Bottom Layer, tented both sides, 361 vias
v2: diameter 0.61, hole 0.305, Top Layer to Bottom Layer, tented both sides, 37 vias
v3: diameter 1, hole 0.5, Top Layer to Bottom Layer, tented both sides, 1 vias

## Nets (pads, with @x,y where several pads share a name; then routed paths per layer and width w, separated by ;. In a path a pad name is that pad's centre, name@x,y a point inside that pad or via, vN(x,y) a via of type N, cw(c..) or ccw(c..) an arc to the next point about the centre after c; other vN are vias at no path point)
5VDIN: LED115.4 R10.1 | length 45
  Top Layer w0.508: LED115.4@76.287,262.022 76.986,262.022 78.74,260.268 78.74,257.347 79.502,256.585 107.315,256.585 108.204,257.474 115.697,257.474 R10.1@116.586,256.585
+1V1: C123.1 C124.1 QU1.23 QU1.45 QU1.50 | length 39.5
  Top Layer w0.229: C123.1@163.068,257.474 163.068,259.633 163.576,260.141 164.465,260.141 165.898,261.574 QU1.23@167.519,261.573 ; QU1.23@167.519,261.573 168.367,261.573 168.529,261.411 168.529,259.887 v1(168.656,259.76) ; v1(168.656,263.062) 168.656,263.824 168.91,264.078 172.72,264.078 173.101,263.697 173.101,262.574 173.302,262.374 ; QU1.45@174.619,260.373 175.409,260.373 177.038,258.744 C124.1@177.038,257.601 ; QU1.45@174.619,260.373 173.632,260.372 172.974,261.03 172.974,262.046 173.302,262.374 ; QU1.50@174.62,262.374 173.302,262.374
  Bottom Layer w0.229: v1(168.656,259.76) 168.656,260.522 168.021,261.157 165.227,261.157 164.465,261.919 164.465,263.189 164.211,263.443 164.211,264.459 164.592,264.84 165.735,264.84 167.513,263.062 v1(168.656,263.062)